# EAGLE board Pyranometer (EAGLE 6.2)
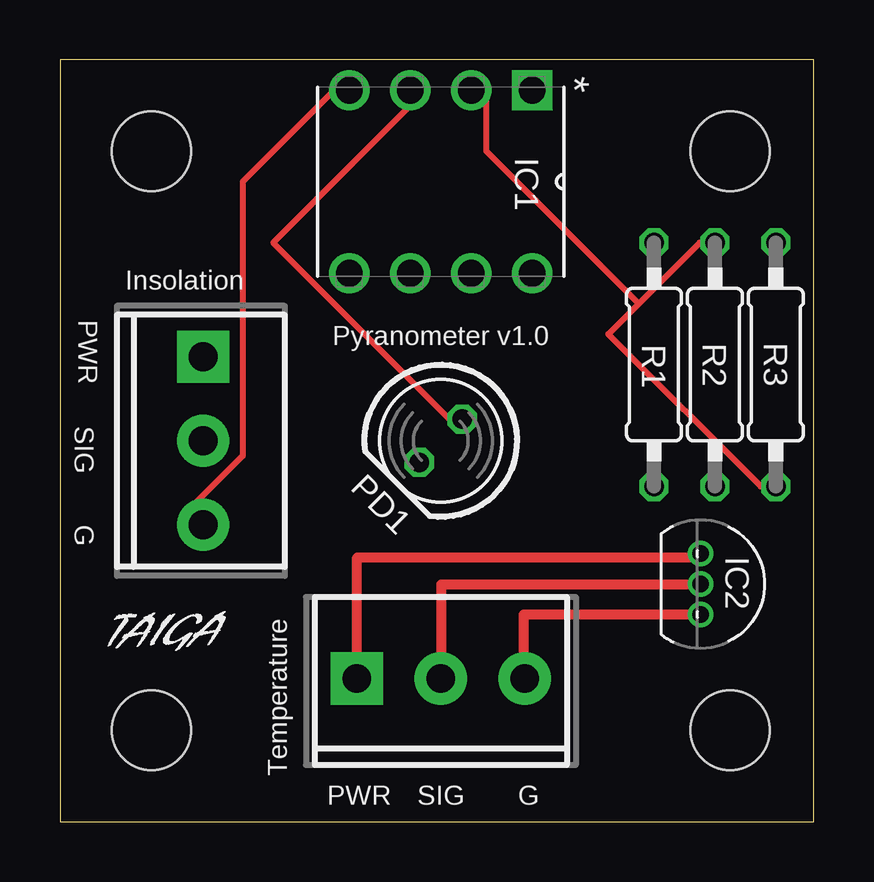
[diagram p0: board, top side]
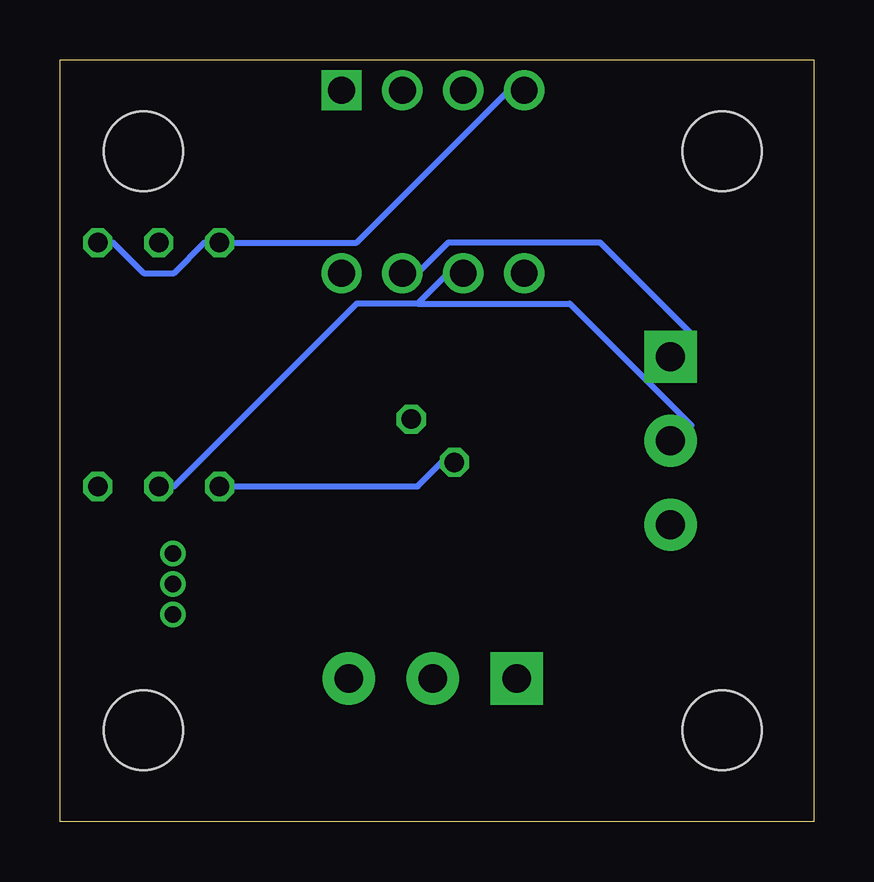
[diagram p1: board, bottom side, seen from below]

Size 31.42 x 31.74 mm. Coordinates in mm from the lower left corner, seen from the top.
Outline: 0,0 31.42,0 31.42,31.74 0,31.74 0,0
Copper layers (1*16): Top 0.0356mm / dielectric 1.5011mm / Bottom 0.0356mm
Design rules: minimum track width 6mil, minimum drill 13mil, track to track 6mil, track to pad 6mil, pad to pad 6mil, via to via 6mil, smd to smd 6mil, copper to edge 15mil, drill to drill 6mil, minimum pad ring 7mil, minimum via ring 7mil, stop-mask expansion 4mil, vias tented up to drill 0mil, thermal gap 10mil

## Footprints (pad centres in the part's own frame; a part is rotated, then mirrored left to right if it is on the bottom)
DIP254P762X508-8 = drill 1.118 square: 1 -7.62,7.62 | drill 1.118: 2 -7.62,5.08; 3 -7.62,2.54; 4 -7.62,0; 5 0,0; 6 0,2.54; 7 0,5.08; 8 0,7.62
TO92-OVAL = drill 0.7 pad 1.016: 1 -1.27,0; 2 0,0; 3 1.27,0
STAND-OFF = hole 3.302: 0,0
LED5MM = drill 0.813 octagon: A -1.27,0; K 1.27,0
0207/10 = drill 0.813 octagon: 1 -5.08,0; 2 5.08,0
SCREWTERM3P5-3 = drill 1.2 pad 2.184 square: P1-1 -3.5,0 | drill 1.2 pad 2.184: P1-2 0,0; P1-3 3.5,0

## Placement (x,y rotation side)
IC1  LTC1050CN8PBF  [DIP254P762X508-8]  12.06,22.86 270 top
IC2  LM35  [TO92-OVAL]  26.71,9.91 270 top
JP1  STAND-OFF  [STAND-OFF]  27.94,27.94 0 top
JP2  STAND-OFF  [STAND-OFF]  27.94,3.81 0 top
JP3  STAND-OFF  [STAND-OFF]  3.81,27.94 90 top
JP4  STAND-OFF  [STAND-OFF]  3.81,3.81 0 top
PD1  [LED5MM]  15.88,15.88 225 top
R1  [0207/10]  24.77,19.05 90 top
R2  [0207/10]  27.3,19.05 270 top
R3  [0207/10]  29.84,19.05 90 top
U$1  SCREWTERM3-3P5  [SCREWTERM3P5-3]  5.97,15.88 270 top
U$2  SCREWTERM3-3P5  [SCREWTERM3P5-3]  15.88,5.97 0 top

## Library data of the parts
IC1 = VAW; MPN: LTC1050CN8#PBF; OC_FARNELL: 9560769; OC_NEWARK: 55M8938; PACKAGE: PDIP; SUPPLIER: LINEAR TECHNOLOGY
IC2 JP1-JP4 PD1 U$1 U$2 = VAW
R1-R3 = rcl

## Nets
5V: IC1.7 U$1.P1-1
GND: IC1.4 R1.2 R3.2 U$1.P1-3
N$1: PD1.K R1.1
N$2: IC1.3 PD1.A
N$3: IC1.2 R2.1 R3.1
N$5: IC2.1 U$2.P1-1
N$6: IC2.3 U$2.P1-3
N$7: IC2.2 U$2.P1-2
SIG: IC1.6 R2.2 U$1.P1-2

## Tracks (layer width: path | path; a pad name or v marks a point on that pad's centre or on a via)
5V
  Bottom 0.254: IC1.7 16.51,22.86 15.24,24.13 8.89,24.13 5.08,20.32 U$1.P1-1
GND
  Top 0.254: U$1.P1-3 5.08,12.7 7.62,15.24 7.62,26.67 11.43,30.48 IC1.4
  Bottom 0.254: R3.2 29.21,24.13 27.94,22.86 26.67,22.86 25.4,24.13 R1.2 19.05,24.13 12.7,30.48 IC1.4
N$1
  Bottom 0.254: R1.1 16.51,13.97 15.24,15.24 PD1.K
N$2
  Top 0.254: PD1.A 16.51,16.51 8.89,24.13 15.24,30.48 IC1.3
N$3
  Top 0.254: 24.13,21.59 26.67,24.13 R2.1 | 24.13,21.59 22.86,20.32 29.21,13.97 R3.1 | 24.13,21.59 17.78,27.94 17.78,30.48 IC1.2
N$5
  Top 0.406: U$2.P1-1 12.39,5.97 12.39,11.01 26.71,11.01 IC2.1
N$6
  Top 0.406: U$2.P1-3 19.34,5.97 19.34,8.64 IC2.3
N$7
  Top 0.406: U$2.P1-2 15.9,5.97 15.9,9.89 26.71,9.89 IC2.2
SIG
  Bottom 0.254: 16.51,21.59 19.05,21.59 26.67,13.97 R2.2 | 16.51,21.59 15.24,22.86 IC1.6 | 16.51,21.59 10.16,21.59 5.08,16.51 U$1.P1-2

## Text on the board
tPlace: Insolation | Pyranometer v1.0 | PWR | SIG | G | Temperature | PWR | SIG | G | /Users/vaw/Desktop/Taiga1.bmp | /Users/vaw/Desktop/Taiga1.bmp